# EAGLE board encoder (EAGLE 9.6.2)
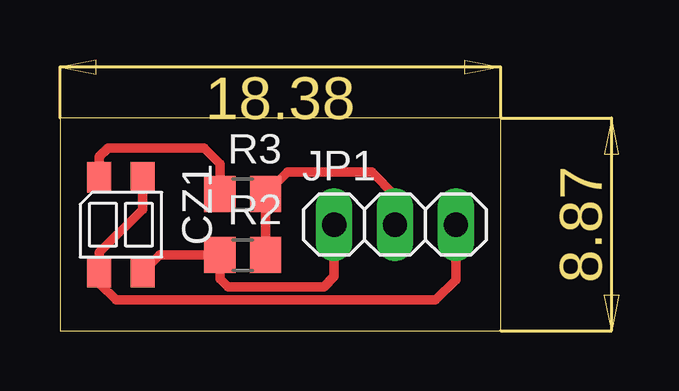
[diagram p0: board, top side]

Size 18.38 x 8.87 mm. Coordinates in mm from the lower left corner, seen from the top.
Outline: 0,0 18.38,0 18.38,8.87 0,8.87 0,0
Copper layers (1*16): Top 0.035mm / dielectric 0.15mm / Bottom 0.035mm
Design rules "default": minimum track width 6mil, minimum drill 0.35mm, track to track 6mil, track to pad 6mil, pad to pad 6mil, via to via 6mil, smd to smd 6mil, copper to edge 40mil, drill to drill 6mil, minimum pad ring 10mil, minimum via ring 8mil, stop-mask expansion 4mil, vias tented up to drill 0mil, thermal gap 10mil

## Footprints (pad centres in the part's own frame; a part is rotated, then mirrored left to right if it is on the bottom)
TOP = smd 1.27 x 1: ANODA -1.985,-0.9; EMITER -1.985,0.9; KATODA 1.985,-0.9; KOLEKTOR 1.985,0.91
1X03 = drill 1.016 long: 1 -2.54,0; 2 0,0; 3 2.54,0
R0805 = smd 1.3 x 1.5: 1 -0.95,0; 2 0.95,0

## Placement (x,y rotation side)
CZ1  KTIR0711S  [TOP]  2.54,4.43 270 top
JP1  [1X03]  13.97,4.43 0 top
R2  20k  [R0805]  7.62,3.16 0 top
R3  200  [R0805]  7.62,5.7 0 top

## Library data of the parts
CZ1 = KTIR0711S
JP1 = pinhead
R2 R3 = rcl; SPICEPREFIX: R

## Nets
N$1: CZ1.EMITER CZ1.KATODA JP1.3
N$2: CZ1.KOLEKTOR JP1.1 R2.1
N$4: CZ1.ANODA R3.1
N$5: JP1.2 R2.2 R3.2

## Tracks (layer width: path | path; a pad name or v marks a point on that pad's centre or on a via)
N$1
  Top 0.4: CZ1.EMITER 3.44,5.06 1.64,3.26 CZ1.KATODA 1.64,1.98 2.34,1.28 15.66,1.28 16.51,2.13 JP1.3
N$2
  Top 0.4: CZ1.KOLEKTOR 4.17,3.16 R2.1 6.67,2.17 7,1.83 11,1.83 11.43,2.27 JP1.1
N$4
  Top 0.4: CZ1.ANODA 1.64,7.26 2,7.62 6,7.62 6.67,6.95 R3.1
N$5
  Top 0.4: R2.2 R3.2 9.49,6.62 13,6.62 13.97,5.65 JP1.2